# Altium PCB DB.PcbDoc (part 2 of 3)
Units mm, origin at the board's own origin, x right, y up, seen from the top; angles counter-clockwise.
Board outline 248 x 160 mm, 2 copper layers (Top Layer, Bottom Layer), stack 1.571 mm thick; 227 components, 245 nets, 960 pads, 72 vias.
Unrouted connection lines stored in the file: 1.
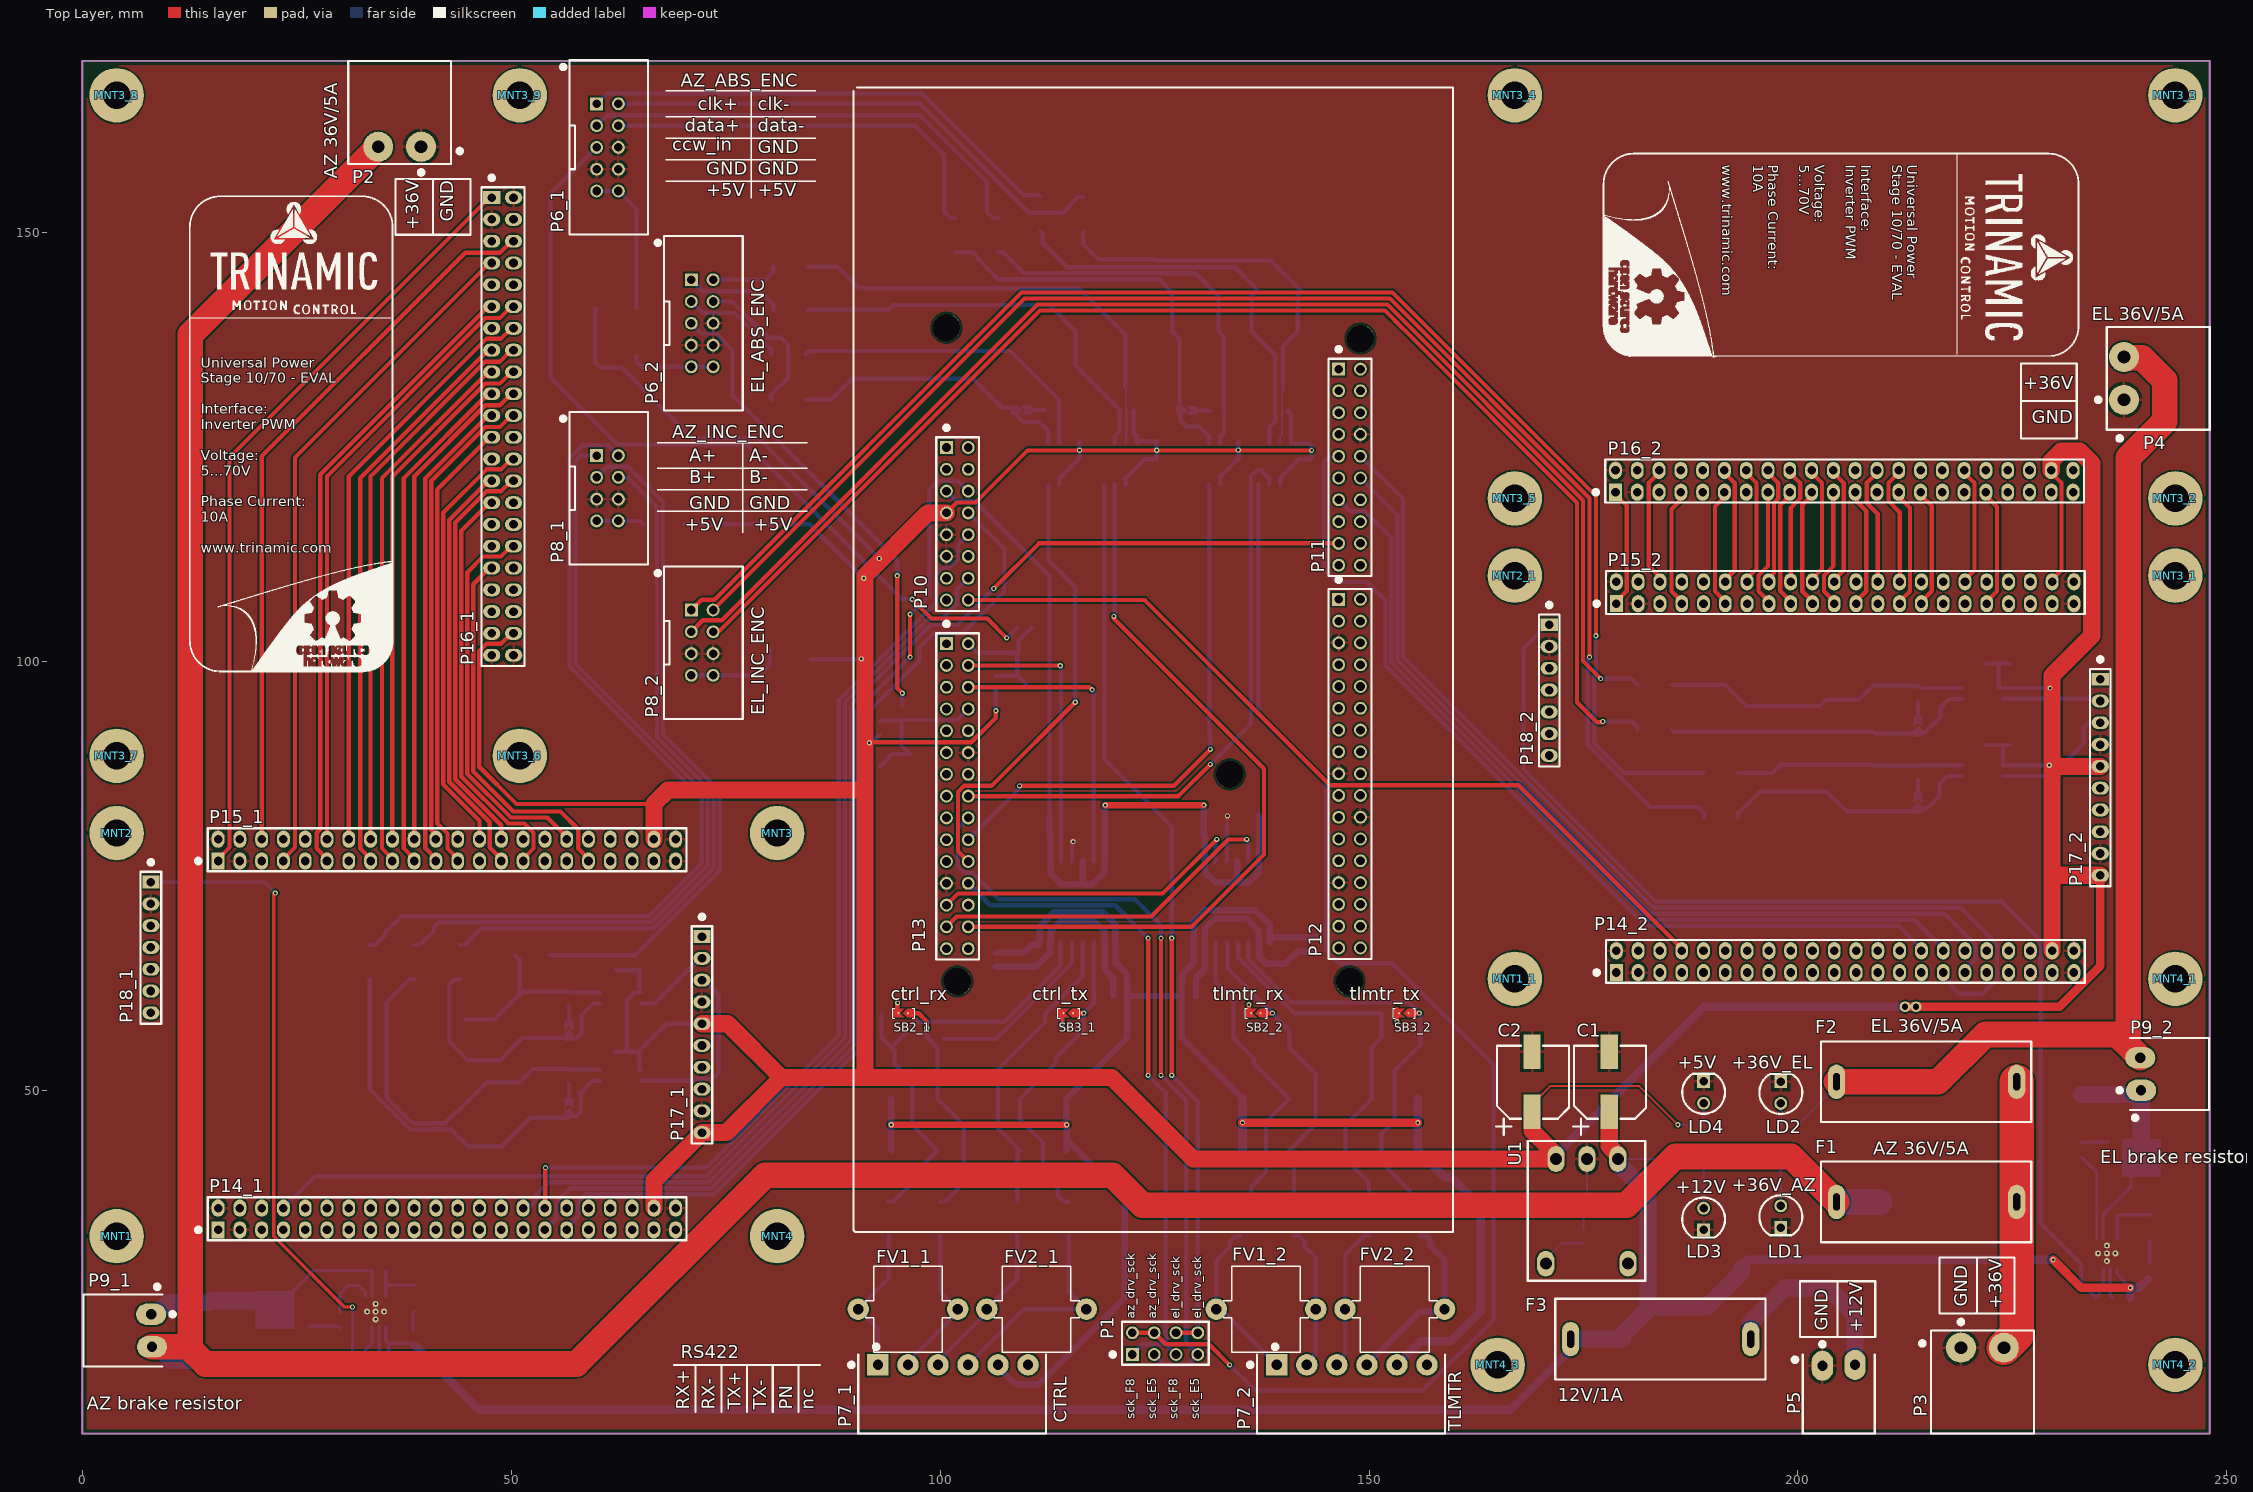
[diagram p0: Top Layer view]

## Via types
v1: diameter 0.6, hole 0.3, Top Layer to Bottom Layer, 60 vias
v2: diameter 0.7, hole 0.3, Top Layer to Bottom Layer, 10 vias
v3: diameter 1.27, hole 0.711, Top Layer to Bottom Layer, 2 vias

## Nets (pads, with @x,y where several pads share a name; then routed paths per layer and width w, separated by ;. In a path a pad name is that pad's centre, name@x,y a point inside that pad or via, vN(x,y) a via of type N, cw(c..) or ccw(c..) an arc to the next point about the centre after c; other vN are vias at no path point) (continued)
+12: (continued)
  Top Layer w2: C1.1@178,47.5 178,43.5 179,42.5 U1.1@179,42
  Bottom Layer w0.25: U1.1@179,42 186.275,42 187.175,41.1 R3.2@187.175,41
  Bottom Layer w0.4: IC6_1.1@35.4,22.43 35.4,20.85 35.75,20.5 ; C20_1.1@36,18.825 35.75,19.075 35.75,20.5 ; R16_1.1@38.5,20.425 38.425,20.5 35.75,20.5 ; IC6_2.1@237.2,29.215 237.2,28.55 v1(238.75,27)
  Bottom Layer w1: R16_1.1@38.75,20.25 46.25,12.75 166.5,12.75 173.5,19.75 F3.2@173.5,21 ; D3.2@193.475,29.3 193.475,29.55 194.175,30.25 v1(229.75,30.25) ; C20_2.1@238.75,25.825 v1(238.75,27) 239.825,27 R16_2.1@240.788,27.962
  Bottom Layer w2: F3.2@173.5,21 D4.1@179.525,21 179.525,21.45 182.5,24.425 ; U1.1@179,42 179,41.5 182.5,38 182.5,24.425 ; D3.2@193.475,29.3 193.475,28.85 189.375,24.75 182.825,24.75 182.5,24.425
+VM: P15_1.1 P15_2.1 P16_1.1 P16_2.1 | length 104.7
  Top Layer w0.5: P15_1.1@15.83,76.737 15.83,76.987 17.17,78.327 17.17,123.76 47.48,154.07 P16_1.1@47.73,154.07 ; P16_2.1@178.73,119.73 178.73,119.48 180.03,118.18 180.03,108.187 178.83,106.987 P15_2.1@178.83,106.737